# Altium PCB multiplexor checkpoint1.PcbDoc (part 2 of 2)
Units mil, origin at the board's own origin, x right, y up, seen from the top; angles counter-clockwise.
Board outline 12250 x 17250 mil, 4 copper layers (Top Layer, Middle 1, Middle 2, Bottom Layer), stack 59.2 mil thick; 172 components, 213 nets, 892 pads, 91 vias.
Unrouted connection lines stored in the file: 234.
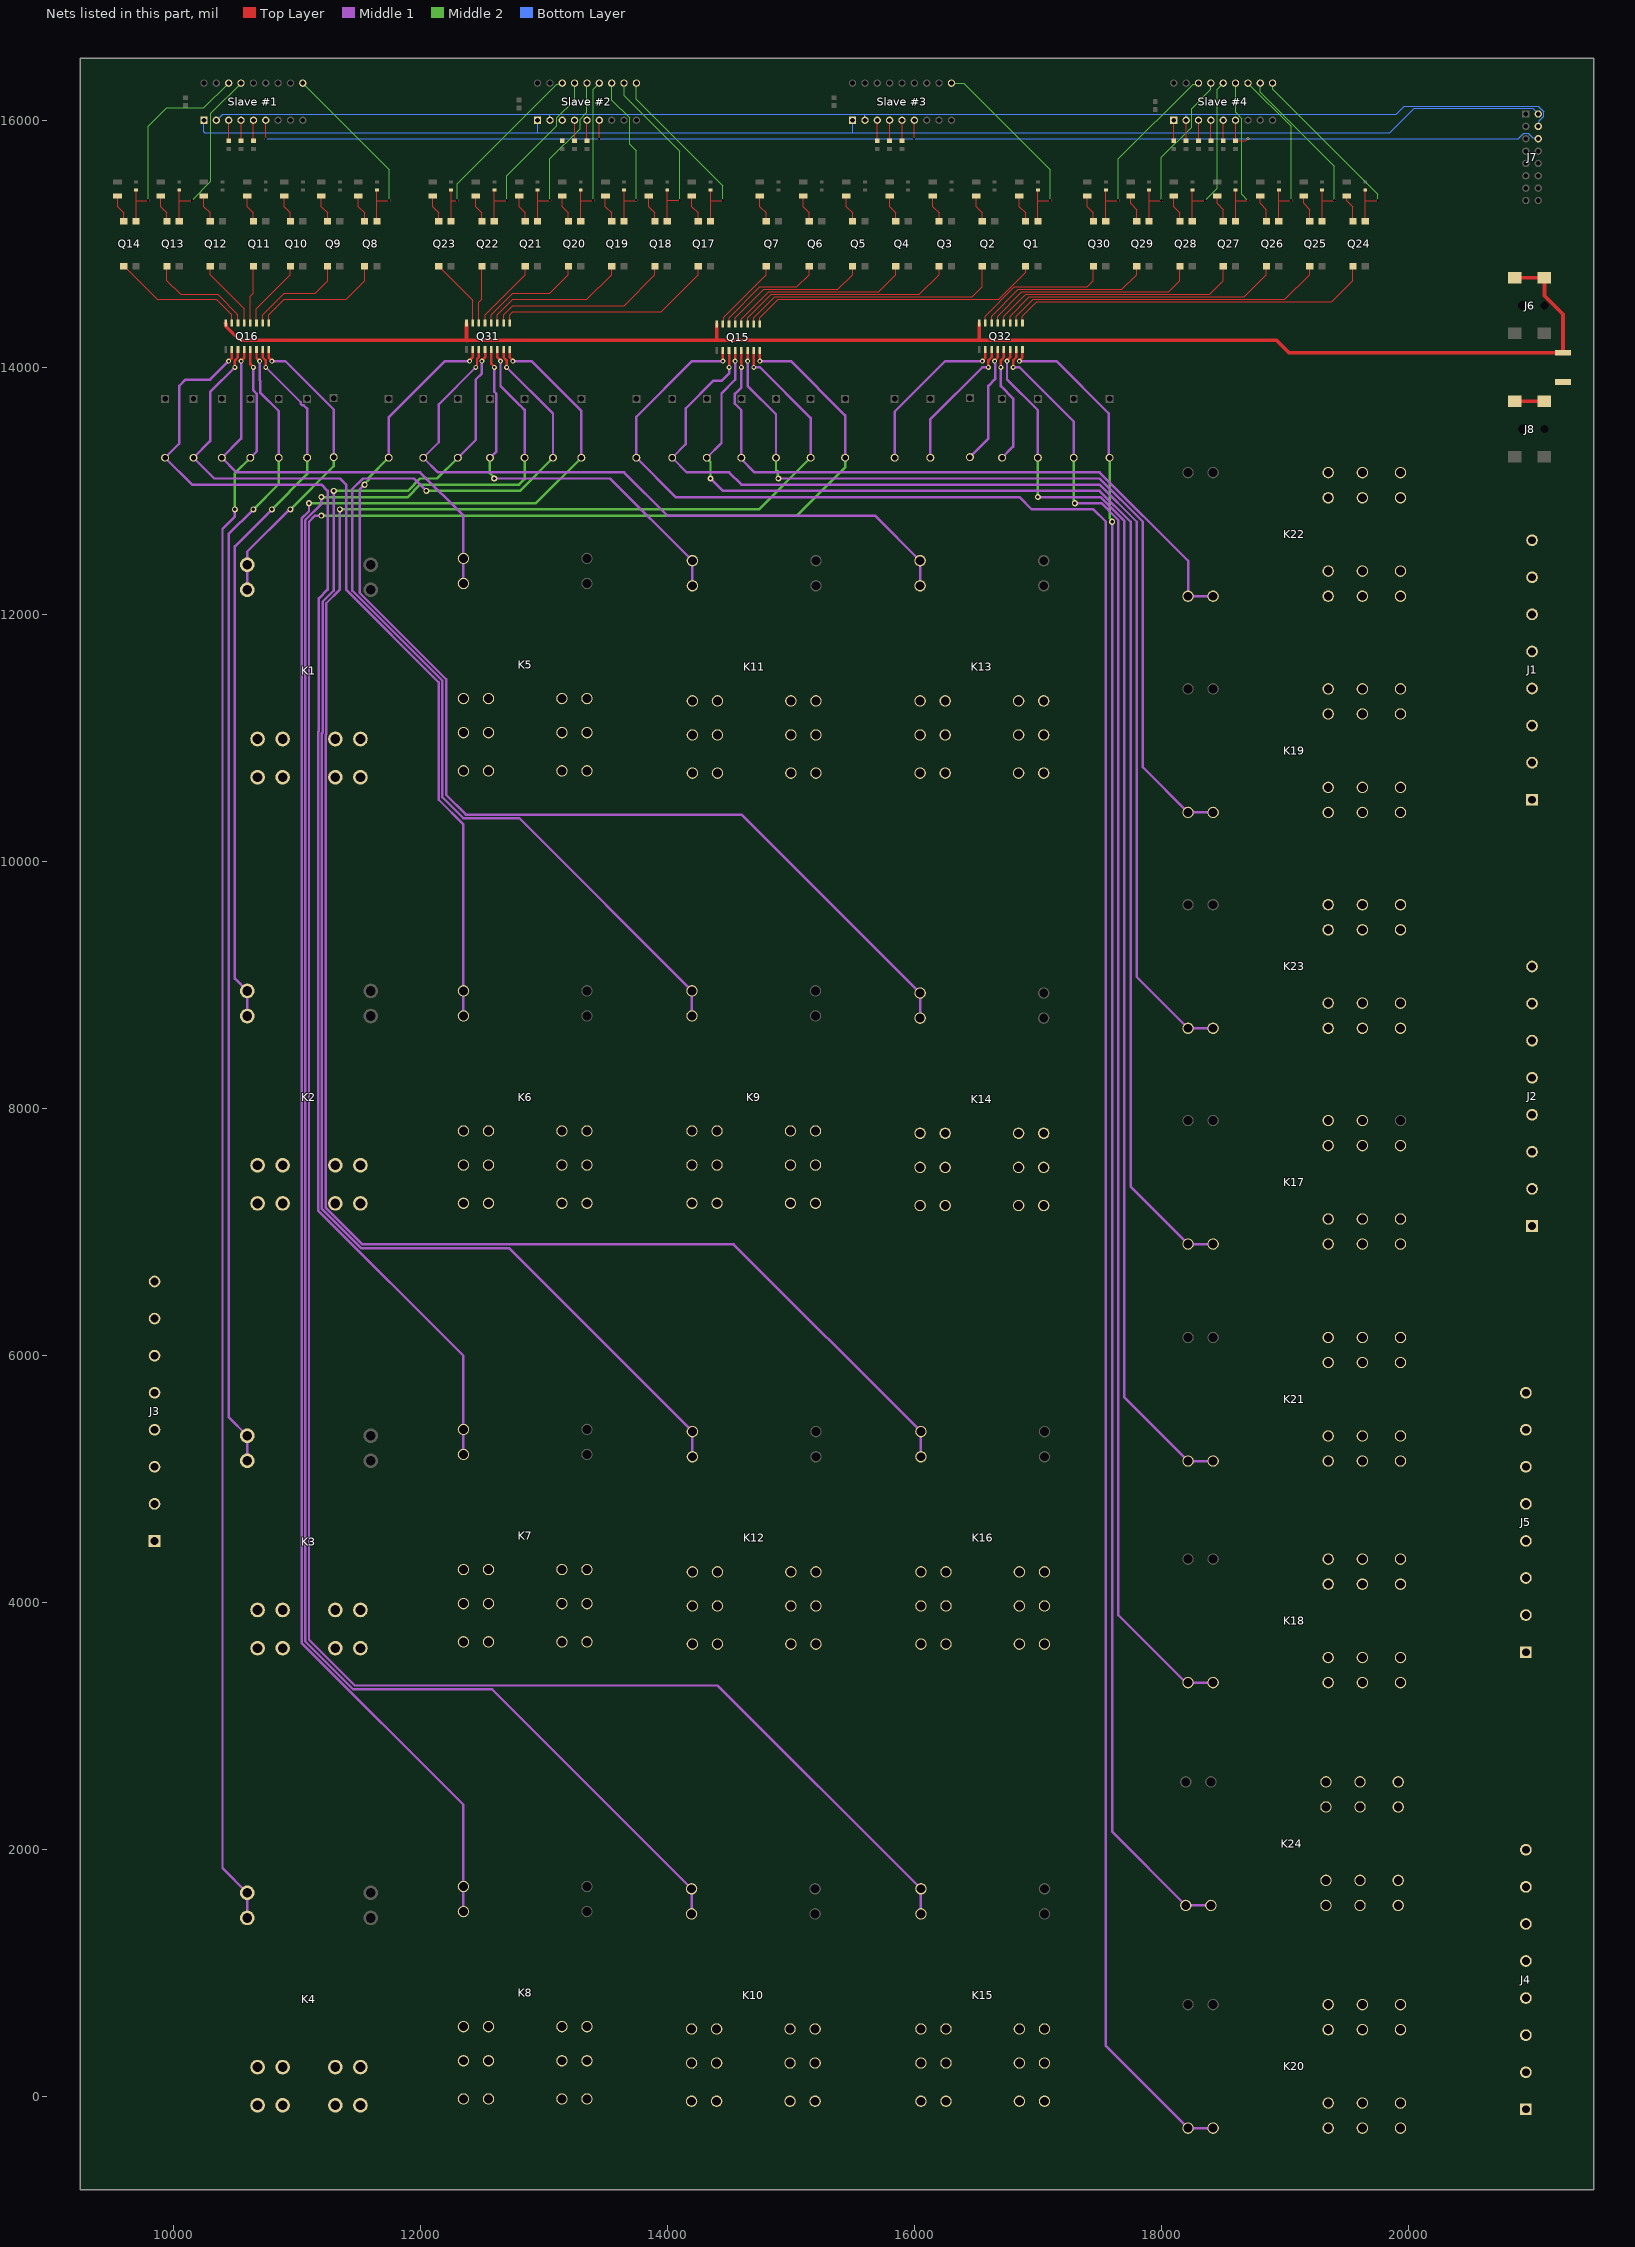
[diagram p4: the nets of this part, all layers, seen from the top]

## Via types
v1: diameter 22, hole 22, Top Layer to Bottom Layer, 41 vias
v2: diameter 40, hole 20, Top Layer to Bottom Layer, 28 vias
v3: diameter 50, hole 28, Top Layer to Bottom Layer, 19 vias
v4: diameter 22, hole 10, Top Layer to Bottom Layer, 3 vias

## Nets (pads, with @x,y where several pads share a name; then routed paths per layer and width w, separated by ;. In a path a pad name is that pad's centre, name@x,y a point inside that pad or via, vN(x,y) a via of type N, cw(c..) or ccw(c..) an arc to the next point about the centre after c; other vN are vias at no path point) (continued)
Net11_2: 11.2 "Slave #1.15" Q13.1 | length 1469.4
  Top Layer w10: Q13.1@10050,15181.1 10050,15350 ; 11.2@10050,15434.82 10050,15350 ; v1(10150,15350) 10050,15350
  Middle 2 w10: v1(10150,15350) 10305.5,15505.5 10305.5,16055.5 10550,16300
Net12_2: 12.2 "Slave #1.16" Q14.1 | length 1748.7
  Top Layer w10: Q14.1@9700,15181.1 9700,15350 ; 12.2@9700,15434.82 9700,15350 ; v1(9800,15350) 9700,15350
  Middle 2 w10: v1(9800,15350) 9800,15950 9950,16100 10250,16100 10450,16300
Net13_2: 13.2 "Slave #3.10" Q1.1 | length 1693.7
  Top Layer w10: Q1.1@17000,15181.1 17000,15350 ; 13.2@17000,15434.82 17000,15350 ; v1(17100,15350) 17000,15350
  Middle 2 w10: 16300,16300 16400,16300 17100,15600 v1(17100,15350)
Net14_2: 14.2 "Slave #1.10" Q8.1 | length 1593.7
  Top Layer w10: Q8.1@11650,15181.1 11650,15350 ; 14.2@11650,15434.82 11650,15350 ; v1(11750,15350) 11650,15350
  Middle 2 w10: 11050,16300 11750,15600 v1(11750,15350)
Net15_2: 15.2 Q2.2 | length 227.6
  Top Layer w10: 15.2@16500,15388 16500,15300 16550,15250 Q2.2@16550,15181.1
Net16_2: 16.2 Q3.2 | length 227.6
  Top Layer w10: 16.2@16150,15388 16150,15300 16200,15250 Q3.2@16200,15181.1
Net17_2: 17.2 Q4.2 | length 227.6
  Top Layer w10: 17.2@15800,15388 15800,15300 15850,15250 Q4.2@15850,15181.1
Net18_2: 18.2 Q5.2 | length 227.6
  Top Layer w10: 18.2@15450,15388 15450,15300 15500,15250 Q5.2@15500,15181.1
Net19_2: 19.2 Q6.2 | length 227.6
  Top Layer w10: 19.2@15100,15388 15100,15300 15150,15250 Q6.2@15150,15181.1
Net20_2: 20.2 Q7.2 | length 227.6
  Top Layer w10: 20.2@14750,15388 14750,15300 14800,15250 Q7.2@14800,15181.1
Net21_2: 21.2 Q9.2 | length 227.6
  Top Layer w10: 21.2@11200,15388 11200,15300 11250,15250 Q9.2@11250,15181.1
Net22_2: 22.2 Q10.2 | length 227.6
  Top Layer w10: 22.2@10900,15388 10900,15300 10950,15250 Q10.2@10950,15181.1
Net23_2: 23.2 Q11.2 | length 227.6
  Top Layer w10: 23.2@10600,15388 10600,15300 10650,15250 Q11.2@10650,15181.1
Net24_2: 24.2 Q12.2 | length 227.6
  Top Layer w10: 24.2@10250,15388 10250,15300 10300,15250 Q12.2@10300,15181.1
Net25_2: 25.2 Q13.2 | length 227.6
  Top Layer w10: 25.2@9900,15388 9900,15300 9950,15250 Q13.2@9950,15181.1
Net26_2: 26.2 Q14.2 | length 227.6
  Top Layer w10: 26.2@9550,15388 9550,15300 9600,15250 Q14.2@9600,15181.1
Net27_2: 27.2 Q1.2 | length 227.6
  Top Layer w10: 27.2@16850,15388 16850,15300 16900,15250 Q1.2@16900,15181.1
Net28_2: 28.2 Q8.2 | length 227.6
  Top Layer w10: 28.2@11500,15388 11500,15300 11550,15250 Q8.2@11550,15181.1
Net29_2: 29.2 "Slave #2.10" Q17.1 | length 1593.7
  Top Layer w10: Q17.1@14350,15181.1 14350,15350 ; 29.2@14350,15434.82 14350,15350 ; v1(14450,15350) 14350,15350
  Middle 2 w10: 13750,16300 13750,16169.99 14450,15469.99 v1(14450,15350)
Net30_2: 30.2 "Slave #2.11" Q18.1 | length 1491.1
  Top Layer w10: Q18.1@14000,15181.1 14000,15352.3 ; 30.2@14000,15434.82 14000,15352.3 ; v1(14100,15350) 14097.7,15352.3 14000,15352.3
  Middle 2 w10: 13650,16300 13650,16200 14100,15750 v1(14100,15350)
Net31_2: 31.2 "Slave #2.12" Q19.1 | length 1381.7
  Top Layer w10: Q19.1@13650,15181.1 13650,15350 ; 31.2@13650,15434.82 13650,15350 ; v1(13747.47,15352.2) 13745.26,15350 13650,15350
  Middle 2 w10: 13550,16300 13550,16162.93 13694.5,16018.43 13694.5,15805.5 13747.47,15752.53 v1(13747.47,15352.2)
Net32_2: 32.2 "Slave #2.13" Q20.1 | length 1324.4
  Top Layer w10: Q20.1@13300,15181.1 13300,15350 ; 32.2@13300,15434.82 13300,15350 ; v1(13400,15350) 13300,15350
  Middle 2 w10: v1(13400,15350) 13400,16250 13450,16300
Net33_2: 33.2 "Slave #2.14" Q21.1 | length 1428
  Top Layer w10: Q21.1@12950,15181.1 12950,15350 ; 33.2@12950,15434.82 12950,15350 ; v1(13050,15350) 12950,15350
  Middle 2 w10: v1(13050,15350) 13050,15686.77 13294.5,15931.27 13294.5,16007.43 13350,16062.93 13350,16300
Net34_2: 34.2 "Slave #2.15" Q22.1 | length 1531.5
  Top Layer w10: Q22.1@12600,15181.1 12600,15350 ; 34.2@12600,15434.82 12600,15350 ; v1(12700,15350) 12600,15350
  Middle 2 w10: v1(12700,15350) 12700,15550 13105.5,15955.5 13105.5,16018.43 13250,16162.93 13250,16300
Net35_2: 35.2 "Slave #2.16" Q23.1 | length 1627.3
  Top Layer w10: Q23.1@12250,15181.1 12250,15350 ; 35.2@12250,15434.82 12250,15350 ; v1(12300,15350) 12250,15350
  Middle 2 w10: v1(12300,15350) 12300,15486.77 13105.5,16292.27 13142.27,16292.27 13150,16300
Net36_2: 36.2 "Slave #4.12" Q26.1 | length 1448.7
  Top Layer w10: Q26.1@18950,15181.1 18950,15350 ; 36.2@18950,15434.82 18950,15350 ; v1(19050,15350) 18950,15350
  Middle 2 w10: 18700,16300 19050,15950 v1(19050,15350)
Net37_2: 37.2 "Slave #4.13" Q27.1 | length 1345.1
  Top Layer w10: Q27.1@18600,15181.1 18600,15350 ; 37.2@18600,15434.82 18600,15350 ; v1(18700,15350) 18600,15350
  Middle 2 w10: 18600,16300 18600,16062.93 18650,16012.93 18650,15400 v1(18700,15350)
Net38_2: 38.2 "Slave #4.14" Q28.1 | length 1365.8
  Top Layer w10: Q28.1@18250,15181.1 18250,15350 ; 38.2@18250,15434.82 18250,15350 ; v1(18350,15350) 18250,15350
  Middle 2 w10: v1(18350,15350) 18450,15450 18450,16250 18500,16300
Net39_2: 39.2 "Slave #4.15" Q29.1 | length 1469.4
  Top Layer w10: Q29.1@17900,15181.1 17900,15350 ; 39.2@17900,15434.82 17900,15350 ; v1(18000,15350) 17900,15350
  Middle 2 w10: v1(18000,15350) 18000,15700 18244.5,15944.5 18244.5,16094.5 18400,16250 18400,16300
Net40_2: 40.2 "Slave #4.16" Q30.1 | length 1594.5
  Top Layer w10: Q30.1@17550,15181.1 17550,15350 ; 40.2@17550,15434.82 17550,15350 ; v1(17650,15350) 17550,15350
  Middle 2 w10: v1(17650,15350) 17650,15686.77 18255.5,16292.27 18292.27,16292.27 18300,16300
Net41_2: 41.2 "Slave #4.10" Q24.1 | length 1655.8
  Top Layer w10: Q24.1@19650,15181.1 19650,15350 ; 41.2@19650,15434.82 19650,15350 ; v1(19750,15350) 19650,15350
  Middle 2 w10: 18900,16300 18900,16250 19750,15400 v1(19750,15350)
Net42_2: 42.2 "Slave #4.11" Q25.1 | length 1552.2
  Top Layer w10: Q25.1@19300,15181.1 19300,15350 ; 42.2@19300,15434.82 19300,15350 ; v1(19400,15350) 19300,15350
  Middle 2 w10: 18800,16300 18800,16228.28 19400,15628.28 v1(19400,15350)
Net43_2: 43.2 Q17.2 | length 227.6
  Top Layer w10: 43.2@14200,15388 14200,15300 14250,15250 Q17.2@14250,15181.1
Net44_2: 44.2 Q18.2 | length 227.6
  Top Layer w10: 44.2@13850,15388 13850,15300 13900,15250 Q18.2@13900,15181.1
Net45_2: 45.2 Q19.2 | length 227.6
  Top Layer w10: 45.2@13500,15388 13500,15300 13550,15250 Q19.2@13550,15181.1
Net46_2: 46.2 Q20.2 | length 227.6
  Top Layer w10: 46.2@13150,15388 13150,15300 13200,15250 Q20.2@13200,15181.1
Net47_2: 47.2 Q21.2 | length 227.6
  Top Layer w10: 47.2@12800,15388 12800,15300 12850,15250 Q21.2@12850,15181.1
Net48_2: 48.2 Q22.2 | length 227.6
  Top Layer w10: 48.2@12450,15388 12450,15300 12500,15250 Q22.2@12500,15181.1
Net49_2: 49.2 Q23.2 | length 227.6
  Top Layer w10: 49.2@12100,15388 12100,15300 12150,15250 Q23.2@12150,15181.1
Net50_2: 50.2 Q26.2 | length 227.6
  Top Layer w10: 50.2@18800,15388 18800,15327.1 18850,15277.1 Q26.2@18850,15181.1
Net51_2: 51.2 Q27.2 | length 227.6
  Top Layer w10: 51.2@18450,15388 18450,15327.1 18500,15277.1 Q27.2@18500,15181.1
Net52_2: 52.2 Q28.2 | length 227.6
  Top Layer w10: 52.2@18100,15388 18100,15300 18150,15250 Q28.2@18150,15181.1
Net53_2: 53.2 Q29.2 | length 227.6
  Top Layer w10: 53.2@17750,15388 17750,15327.1 17800,15277.1 Q29.2@17800,15181.1
Net54_2: 54.2 Q30.2 | length 227.6
  Top Layer w10: 54.2@17400,15388 17400,15300 17450,15250 Q30.2@17450,15181.1
Net55_2: 55.2 Q24.2 | length 227.6
  Top Layer w10: 55.2@19500,15388 19500,15350 19550,15300 Q24.2@19550,15181.1
Net56_2: 56.2 Q25.2 | length 227.6
  Top Layer w10: 56.2@19150,15388 19150,15327.1 19200,15277.1 Q25.2@19200,15181.1
NetCR1_2: CR1.2 K1.1_1 K1.1_2 Q16.16 | length 2519.2
  Top Layer w20: Q16.16@10775,14142.75 10775,14075.54 10800,14050.54 v2(10800,14050)
  Middle 1 w20: K1.1_1@10600,12198.82 K1.1_2@10600,12401.97 10600,12508.08 10941.92,12850 v3(10950,12850) ; v2(10800,14050) 10907.72,14050 11300,13657.72 CR1.2@11300,13273
  Middle 2 w20: v3(10950,12850) 11300,13200 CR1.2@11300,13273
NetCR2_2: CR2.2 K2.1_1 K2.1_2 Q16.15 | length 5834
  Top Layer w20: Q16.15@10725,14142.75 10725,14081.57 10750,14056.57 v2(10750,14000)
  Middle 1 w20: K2.1_1@10600,8748.82 K2.1_2@10600,8951.97 10500,9051.97 10500,12550 v3(10800,12850) ; v2(10750,14000) 11033,13717 11033,13704.72 11044.72,13693 11057,13693 11085,13665 CR2.2@11085,13268
  Middle 2 w20: v3(10800,12850) 11085,13135 CR2.2@11085,13268
NetCR3_2: CR3.2 K3.1_1 K3.1_2 Q16.14 | length 9298.4
  Top Layer w20: Q16.14@10675,14142.75 10675,14075.54 10700,14050.54 v2(10700,14050)
  Middle 1 w20: K3.1_1@10600,5148.82 K3.1_2@10600,5351.97 10450,5501.97 10450,12650 v3(10650,12850) ; v2(10700,14050) 10700,13895.82 10707,13888.82 10707,13793 10855,13645 CR3.2@10855,13268
  Middle 2 w20: v3(10650,12850) 10855,13055 CR3.2@10855,13268
NetCR4_2: CR4.2 K4.1_1 K4.1_2 Q16.13 | length 12913.1
  Top Layer w20: Q16.13@10625,14142.75 10625,14025.54 10650,14000.54 v2(10650,14000)
  Middle 1 w20: v3(10500,12850) 10500,12792.43 10400,12692.43 10400,1851.97 K4.1_2@10600,1651.97 K4.1_1@10600,1448.82 ; CR4.2@10625,13268 10677,13320 10677,13785.28 10650,13812.28 v2(10650,14000)
  Middle 2 w20: v3(10500,12850) 10500,13143 CR4.2@10625,13268
NetCR5_2: CR5.2 K5.1 K5.2 Q16.12 | length 3648.2
  Top Layer w20: v2(10550,14050) 10550,14050.54 10575,14075.54 Q16.12@10575,14142.75
  Middle 1 w20: v2(10550,14050) 10550,13423 CR5.2@10395,13268 10513,13150 12000,13150 12350,12800 K5.1@12350,12453 K5.2@12350,12250
NetCR6_2: CR6.2 K6.1 K6.2 Q16.11 | length 7042.7
  Top Layer w20: v2(10500,14000) 10500,14056.57 10525,14081.57 Q16.11@10525,14142.75
  Middle 1 w20: v2(10500,14000) 10300,13800 10300,13403 CR6.2@10165,13268 10333,13100 11350,13100 11400,13050 11400,12200 12150,11450 12150,10500 12350,10300 K6.1@12350,8953 K6.2@12350,8750
NetCR7_2: CR7.2 K7.1 K7.2 Q16.10 | length 10960.1
  Top Layer w20: v2(10450,14050) 10475,14075 Q16.10@10475,14142.75
  Middle 1 w20: v2(10450,14050) 10300,13900 10100,13900 10050,13850 10050,13383 CR7.2@9935,13268 10153,13050 11200,13050 11250,13000 11250,12200 11180,12130 11180,11054.86 11174.15,11049.01 11174.15,7174.61 12350,5998.77 K7.1@12350,5403 K7.2@12350,5200
NetCR8_2: CR8.2 K8.1 K8.2 Q31.16 | length 15527.8
  Top Layer w20: Q31.16@12725,14142.75 12725,14080.41 12750,14055.41 v2(12750,14050)
  Middle 1 w20: v3(11100,12900) 11100,12834.85 11040,12774.85 11040,3675.15 12350,2365.15 K8.1@12350,1703 K8.2@12350,1500 ; v2(12750,14050) 12900,14050 13305,13645 CR8.2@13305,13268
  Middle 2 w20: v3(11100,12900) 12937,12900 CR8.2@13305,13268
NetCR9_2: CR9.2 K9.1 K9.2 Q31.15 | length 8521.7
  Top Layer w20: Q31.15@12675,14142.75 12675,14081.57 12700,14056.57 v2(12700,14000)
  Middle 1 w20: v3(12050,13000) 11950,13100 11536.36,13100 11450,13013.64 11450,12192.43 12180,11462.43 12180,10520 12350,10350 12803,10350 K9.1@14200,8953 K9.2@14200,8750 ; v2(12700,14000) 13075,13625 CR9.2@13075,13268
  Middle 2 w20: v3(12050,13000) 12807,13000 CR9.2@13075,13268
NetCR10_2: CR10.2 K10.1 K10.2 Q31.14 | length 16321.3
  Top Layer w20: Q31.14@12625,14142.75 12625,14080.41 12650,14055.41 v2(12650,14050)
  Middle 1 w20: v3(11200,12950) 11200,12892.43 11070,12762.43 11070,3687.57 11457.57,3300 12581.5,3300 K10.1@14197,1684.5 K10.2@14197,1481.5 ; v2(12650,14050) 12650,13850 12793,13707 12793,13704.72 12804.72,13693 12807,13693 12845,13655 CR10.2@12845,13268
  Middle 2 w20: v3(11200,12950) 11900,12950 12000,13050 12800,13050 12845,13095 CR10.2@12845,13268
NetCR11_2: CR11.2 K11.1 K11.2 Q31.13 | length 3177.8
  Top Layer w20: Q31.13@12575,14142.75 12575,14030.41 12600,14005.41 v2(12600,14000)
  Middle 1 w20: CR11.2@12565,13268 12617,13320 12617,13785.28 12600,13802.28 v2(12600,14000) ; v3(12600,13100) 13537.5,13100 K11.1@14203,12434.5 K11.2@14203,12231.5
  Middle 2 w20: CR11.2@12565,13268 12565,13142.78 12600,13107.78 v3(12600,13100)
NetCR12_2: CR12.2 K12.1 K12.2 Q31.12 | length 11883
  Top Layer w20: v2(12500,14050) 12500,14055.41 12525,14080.41 Q31.12@12525,14142.75
  Middle 1 w20: v3(11300,13000) 11300,12192.43 11210,12102.43 11210,11042.43 11204.15,11036.58 11204.15,7187.04 11521.19,6870 12717.5,6870 K12.1@14203,5384.5 K12.2@14203,5181.5 ; CR12.2@12305,13268 12450,13413 12450,13900 12500,13950 v2(12500,14050)
  Middle 2 w20: v3(11300,13000) 11900,13000 12000,13100 12137,13100 CR12.2@12305,13268
NetCR13_2: CR13.2 K13.1 K13.2 Q31.11 | length 5631.4
  Top Layer w20: v2(12450,14000) 12450,14000.54 12460,14010.54 12460,14066.57 12475,14081.57 Q31.11@12475,14142.75
  Middle 1 w20: v2(12450,14000) 12150,13700 12150,13393 CR13.2@12025,13268 12143,13150 13650,13150 14000,12800 15681.5,12800 K13.1@16047,12434.5 K13.2@16047,12231.5
NetCR14_2: CR14.2 K14.1 K14.2 Q31.10 | length 9093.9
  Top Layer w20: v2(12400,14050) 12400,14055.41 12425,14080.41 Q31.10@12425,14142.75
  Middle 1 w20: v3(11550,13050) 11510,13010 11510,12174.85 12210,11474.85 12210,10540 12370,10380 14601.5,10380 K14.1@16047,8934.5 K14.2@16047,8731.5 ; CR14.2@11745,13268 11745,13595 12200,14050 v2(12400,14050)
  Middle 2 w20: v3(11550,13050) 11550,13058.12 11584.46,13092.58 11584.46,13107.46 CR14.2@11745,13268
NetCR15_2: CR15.2 K15.1 K15.2 Q15.16 | length 20940.9
  Top Layer w20: v2(14750,14050) Q15.16@14750,14135.5
  Middle 1 w20: v3(11200,12800) 11150,12800 11100,12750 11100,3700 11470,3330 14407.5,3330 K15.1@16053,1684.5 K15.2@16053,1481.5 ; v2(14750,14050) 15000,14050 15440,13610 CR15.2@15440,13268
  Middle 2 w20: v3(11200,12800) 15050,12800 15440,13190 CR15.2@15440,13268
NetCR16_2: CR16.2 K16.1 K16.2 Q15.15 | length 16542.6
  Top Layer w20: v2(14700,14000) Q15.15@14700,14135.5
  Middle 1 w20: v3(11350,12850) 11350,12200 11240,12090 11240,11030 11234.15,11024.16 11234.15,7199.46 11533.62,6900 14537.5,6900 K16.1@16053,5384.5 K16.2@16053,5181.5 ; v2(14700,14000) 14750,14000 15160,13590 CR16.2@15160,13268
  Middle 2 w20: v3(11350,12850) 14742,12850 CR16.2@15160,13268
NetCR17_2: CR17.2 K19.1 K19.2 Q15.14 | length 6941.4
  Top Layer w20: v2(14650,14050) Q15.14@14650,14135.5
  Middle 1 w20: v2(14650,14050) 14650,13850 14880,13620 CR17.2@14880,13268 ; v3(14900,13100) 17500,13100 17850,12750 17850,10762.5 K19.1@18215.5,10397 K19.2@18418.5,10397
  Middle 2 w20: CR17.2@14880,13268 14880,13170 14895,13155 14895,13105 v3(14900,13100)
NetCR18_2: CR18.2 K22.1 K22.2 Q15.13 | length 5368.8
  Top Layer w20: v2(14600,14000) Q15.13@14600,14135.5
  Middle 1 w20: v2(14600,14000) 14600,13837.28 14548,13785.28 14548,13704.72 14600,13652.72 14600,13256.09 14706.09,13150 17500,13150 18215.5,12434.5 K22.1@18215.5,12147 K22.2@18418.5,12147
NetCR19_2: CR19.2 K17.1 K17.2 Q15.12 | length 10931
  Top Layer w20: v2(14550,14050) Q15.12@14550,14135.5
  Middle 1 w20: CR19.2@14320,13268 14439.02,13387.02 14439.02,13789.02 14550,13900 v2(14550,14050) ; v3(14350,13100) 14450,13000 17500,13000 17750,12750 17750,7368.5 K17.1@18215.5,6903 K17.2@18418.5,6903
  Middle 2 w20: CR19.2@14320,13268 14320,13264.28 14350,13234.28 v3(14350,13100)
NetCR20_2: CR20.2 K23.1 K23.2 Q15.11 | length 9547.1
  Top Layer w20: v2(14500,14000) Q15.11@14500,14135.5
  Middle 1 w20: v2(14500,14000) 14500,13950 14442.45,13892.45 14375.17,13892.45 14150,13667.28 14150,13378 CR20.2@14040,13268 14158,13150 14500,13150 14600,13050 17500,13050 17800,12750 17800,9065.5 K23.1@18215.5,8650 K23.2@18418.5,8650
NetCR21_2: CR21.2 K20.1 K20.2 Q15.10 | length 18800.1
  Top Layer w20: v2(14450,14050) Q15.10@14450,14135.5
  Middle 1 w20: v2(14450,14050) 14200,14050 13750,13600 CR21.2@13750,13268 14068,12950 16850,12950 16950,12850 17450,12850 17550,12750 17550,412.5 K20.1@18215.5,-253 K20.2@18418.5,-253
NetCR22_2: CR22.2 K24.1 K24.2 Q32.16 | length 13539.8
  Top Layer w20: v2(16850,14050) 16850,14055.41 16875,14080.41 Q32.16@16875,14142.75
  Middle 1 w20: v2(16850,14050) 17150,14050 17572.25,13627.75 17572.25,13275.75 CR22.2@17580,13268 ; v3(17600,12750) 17600,2147 K24.1@18197,1550 K24.2@18400,1550
  Middle 2 w20: CR22.2@17580,13268 17580,12778.12 17600,12758.12 v3(17600,12750)
NetCR23_2: CR23.2 K18.1 K18.2 Q32.15 | length 11754.7
  Top Layer w20: v2(16800,14000) 16800,14056.57 16825,14081.57 Q32.15@16825,14142.75
  Middle 1 w20: v2(16800,14000) 16850,14000 17290,13560 CR23.2@17290,13268 ; v3(17300,12900) 17513.64,12900 17650,12763.64 17650,3900 18197,3353 K18.1@18215.5,3353 K18.2@18418.5,3353
  Middle 2 w20: CR23.2@17290,13268 17290,12918.12 17300,12908.12 v3(17300,12900)
NetCR24_2: CR24.2 K21.1 K21.2 Q32.14 | length 10112.6
  Top Layer w20: v2(16750,14050) 16750,14055.41 16775,14080.41 Q32.14@16775,14142.75
  Middle 1 w20: v2(16750,14050) 16750,13902.72 17000,13652.72 CR24.2@17000,13268 ; v3(17000,12950) 17506.07,12950 17700,12756.07 17700,5662.5 K21.1@18215.5,5147 K21.2@18418.5,5147
  Middle 2 w20: v3(17000,12950) CR24.2@17000,13268
NetCR25_2: CR25.2 Q32.13 | length 963.8
  Top Layer w20: v2(16700,14000) 16700,14056.57 16725,14081.57 Q32.13@16725,14142.75
  Middle 1 w20: v2(16700,14000) 16700,13847.28 16800,13747.28 16800,13358 CR25.2@16710,13268
NetCR26_2: CR26.2 Q32.12 | length 966.1
  Top Layer w20: v2(16650,14050) 16650,14055.41 16675,14080.41 Q32.12@16675,14142.75
  Middle 1 w20: CR26.2@16450,13273 16600,13423 16600,13850 16653.83,13903.83 16653.83,14046.17 v2(16650,14050)
NetCR27_2: CR27.2 Q32.11 | length 1109.1
  Top Layer w20: v2(16600,14000) 16600,14056.57 16625,14081.57 Q32.11@16625,14142.75
  Middle 1 w20: CR27.2@16130,13268 16130,13580 16550,14000 v2(16600,14000)
NetCR28_2: CR28.2 Q32.10 | length 1354.9
  Top Layer w20: v2(16550,14050) 16550,14052.21 16575,14077.21 Q32.10@16575,14142.75
  Middle 1 w20: CR28.2@15840,13268 15840,13640 16250,14050 v2(16550,14050)
NetJ1_1: J1.1 K19.11 K19.12
NetJ1_2: J1.2 K19.5 K19.6
NetJ1_3: J1.3 K19.13 K19.14
NetJ1_4: J1.4 K19.3 K19.4
NetJ1_5: J1.5 K22.11 K22.12
NetJ1_6: J1.6 K22.5 K22.6
NetJ1_7: J1.7 K22.13 K22.14
NetJ1_8: J1.8 K22.3 K22.4
NetJ2_1: J2.1 K17.11 K17.12
NetJ2_2: J2.2 K17.5 K17.6
NetJ2_3: J2.3 K17.13 K17.14
NetJ2_4: J2.4 K17.3 K17.4
NetJ2_5: J2.5 K23.11 K23.12
NetJ2_6: J2.6 K23.5 K23.6
NetJ2_7: J2.7 K23.13 K23.14
NetJ2_8: J2.8 K23.3 K23.4
NetJ3_1: J3.1 K4.6_1 K4.6_2
NetJ3_2: J3.2 K4.2_1 K4.2_2
NetJ3_3: J3.3 K3.6_1 K3.6_2
NetJ3_4: J3.4 K3.2_1 K3.2_2
NetJ3_5: J3.5 K2.6_1 K2.6_2
NetJ3_6: J3.6 K2.2_1 K2.2_2
NetJ3_7: J3.7 K1.6_1 K1.6_2
NetJ3_8: J3.8 K1.2_1 K1.2_2
NetJ4_1: J4.1 K20.11 K20.12
NetJ4_2: J4.2 K20.5 K20.6
NetJ4_3: J4.3 K20.13 K20.14
NetJ4_4: J4.4 K20.3 K20.4
NetJ4_5: J4.5 K24.11 K24.12
NetJ4_6: J4.6 K24.5 K24.6
NetJ4_7: J4.7 K24.13 K24.14
NetJ4_8: J4.8 K24.3 K24.4
NetJ5_1: J5.1 K18.11 K18.12
NetJ5_2: J5.2 K18.5 K18.6
NetJ5_3: J5.3 K18.13 K18.14
NetJ5_4: J5.4 K18.3 K18.4
NetJ5_5: J5.5 K21.13 K21.14
NetJ5_6: J5.6 K21.3 K21.4
NetJ5_7: J5.7 K21.11 K21.12
NetJ5_8: J5.8 K21.5 K21.6
NetJ8_2: J8.2 J8.3 R16.2 | length 240.2
  Top Layer w30: J8.3@20859.84,13724.41 J8.2@21100,13724.41
NetK1_4_1: K1.4_1 K1.4_2 K5.9 K5.10
NetK1_8_1: K1.8_1 K1.8_2 K5.7 K5.8
NetK2_4_1: K2.4_1 K2.4_2 K6.9 K6.10
NetK2_8_1: K2.8_1 K2.8_2 K6.7 K6.8
NetK3_4_1: K3.4_1 K3.4_2 K7.9 K7.10
NetK3_8_1: K3.8_1 K3.8_2 K7.7 K7.8
NetK4_4_1: K4.4_1 K4.4_2 K8.9 K8.10
NetK4_8_1: K4.8_1 K4.8_2 K8.7 K8.8
NetK5_3: K5.3 K5.4 K6.3 K6.4 K10.7 K10.8
NetK5_5: K5.5 K5.6 K6.5 K6.6 K9.7 K9.8
NetK5_11: K5.11 K5.12 K6.11 K6.12 K9.9 K9.10
NetK5_13: K5.13 K5.14 K6.13 K6.14 K10.9 K10.10
NetK7_3: K7.3 K7.4 K8.3 K8.4 K12.7 K12.8
NetK7_5: K7.5 K7.6 K8.5 K8.6 K11.7 K11.8
NetK7_11: K7.11 K7.12 K8.11 K8.12 K11.9 K11.10
NetK7_13: K7.13 K7.14 K8.13 K8.14 K12.9 K12.10
NetK9_3: K9.3 K9.4 K11.3 K11.4 K14.7 K14.8
NetK9_5: K9.5 K9.6 K11.5 K11.6 K13.7 K13.8
NetK9_11: K9.11 K9.12 K11.11 K11.12 K13.9 K13.10
NetK9_13: K9.13 K9.14 K11.13 K11.14 K14.9 K14.10
NetK10_3: K10.3 K10.4 K12.3 K12.4 K16.7 K16.8
NetK10_5: K10.5 K10.6 K12.5 K12.6 K15.7 K15.8
NetK10_11: K10.11 K10.12 K12.11 K12.12 K15.9 K15.10
NetK10_13: K10.13 K10.14 K12.13 K12.14 K16.9 K16.10
NetK13_3: K13.3 K13.4 K22.7 K22.8
NetK13_5: K13.5 K13.6 K19.7 K19.8
NetK13_11: K13.11 K13.12 K19.9 K19.10
NetK13_13: K13.13 K13.14 K22.9 K22.10
NetK14_3: K14.3 K14.4 K23.7 K23.8
NetK14_5: K14.5 K14.6 K17.7 K17.8
NetK14_11: K14.11 K14.12 K17.10
NetK14_13: K14.13 K14.14 K23.9 K23.10
NetK15_3: K15.3 K15.4 K24.7 K24.8
NetK15_5: K15.5 K15.6 K20.7 K20.8
NetK15_11: K15.11 K15.12 K20.9 K20.10
NetK15_13: K15.13 K15.14 K24.9 K24.10
NetK16_3: K16.3 K16.4 K21.7 K21.8
NetK16_5: K16.5 K16.6 K18.7 K18.8
NetK16_11: K16.11 K16.12 K18.9 K18.10
NetK16_13: K16.13 K16.14 K21.9 K21.10
NetQ1_3: Q1.3 Q15.1 | length 2403.5
  Top Layer w10: Q15.1@14750,14350 14750,14400 14900,14550 16682.25,14550 16900,14767.75 Q1.3@16900,14818.9
NetQ2_3: Q2.3 Q15.2 | length 2172.5
  Top Layer w10: Q15.2@14700,14350 14700,14400 14870,14570 16470,14570 16550,14650 Q2.3@16550,14818.9
NetQ3_3: Q3.3 Q15.3 | length 1813.9
  Top Layer w10: Q15.3@14650,14350 14650,14400 14840,14590 16040,14590 16200,14750 Q3.3@16200,14818.9
NetQ4_3: Q4.3 Q15.4 | length 1508
  Top Layer w10: Q15.4@14600,14350 14600,14389.97 14820.03,14610 15710,14610 15850,14750 Q4.3@15850,14818.9
NetQ5_3: Q5.3 Q15.5 | length 1213.9
  Top Layer w10: Q15.5@14550,14350 14550,14400 14780,14630 15380,14630 15500,14750 Q5.3@15500,14818.9
NetQ6_3: Q6.3 Q15.6 | length 913.9
  Top Layer w10: Q15.6@14500,14350 14500,14400 14750,14650 15050,14650 15150,14750 Q6.3@15150,14818.9
NetQ7_3: Q7.3 Q15.7 | length 613.9
  Top Layer w10: Q15.7@14450,14350 14455.5,14355.5 14455.5,14405.5 14800,14750 Q7.3@14800,14818.9
NetQ8_3: Q8.3 Q16.1 | length 1075.6
  Top Layer w10: Q16.1@10775,14357.25 10775,14425 10900,14550 11400,14550 11550,14700 Q8.3@11550,14818.9
NetQ9_3: Q9.3 Q16.2 | length 825.6
  Top Layer w10: Q16.2@10725,14357.25 10725,14425 10900,14600 11150,14600 11250,14700 Q9.3@11250,14818.9
NetQ10_3: Q10.3 Q16.3 | length 575.6
  Top Layer w10: Q16.3@10675,14357.25 10675,14475 10950,14750 Q10.3@10950,14818.9
NetQ11_3: Q11.3 Q16.4 | length 472
  Top Layer w10: Q16.4@10625,14357.25 10625,14575 10650,14600 Q11.3@10650,14818.9
NetQ12_3: Q12.3 Q16.5 | length 575.6
  Top Layer w10: Q12.3@10300,14818.9 10300,14750 10575,14475 Q16.5@10575,14357.25
NetQ13_3: Q13.3 Q16.6 | length 875.6
  Top Layer w10: Q13.3@9950,14818.9 9950,14700 10060.35,14589.65 10360.35,14589.65 10525,14425 Q16.6@10525,14357.25
NetQ14_3: Q14.3 Q16.7 | length 1105.9
  Top Layer w10: Q14.3@9600,14818.9 9603.94,14818.9 9872.83,14550 10350,14550 10475,14425 Q16.7@10475,14357.25
NetQ17_3: Q17.3 Q31.1 | length 1796.3
  Top Layer w10: Q31.1@12725,14357.25 12725,14425 12750,14450 13950,14450 14250,14750 Q17.3@14250,14818.9
NetQ18_3: Q18.3 Q31.2 | length 1496.3
  Top Layer w10: Q31.2@12675,14357.25 12675,14425 12750,14500 13650,14500 13900,14750 Q18.3@13900,14818.9
NetQ19_3: Q19.3 Q31.3 | length 1196.3
  Top Layer w10: Q31.3@12625,14357.25 12625,14425 12750,14550 13350,14550 13550,14750 Q19.3@13550,14818.9
NetQ20_3: Q20.3 Q31.4 | length 896.3
  Top Layer w10: Q31.4@12575,14357.25 12575,14425 12749.95,14599.95 13049.95,14599.95 13200,14750 Q20.3@13200,14818.9
NetQ21_3: Q21.3 Q31.5 | length 596.3
  Top Layer w10: Q31.5@12525,14357.25 12525,14425 12850,14750 Q21.3@12850,14818.9
NetQ22_3: Q22.3 Q31.6 | length 472
  Top Layer w10: Q31.6@12475,14357.25 12475,14525 12500,14550 Q22.3@12500,14818.9
NetQ23_3: Q23.3 Q31.7 | length 577.9
  Top Layer w10: Q23.3@12150,14818.9 12153.94,14818.9 12174.53,14798.31 12174.53,14794.37 12425,14543.9 Q31.7@12425,14357.25
NetQ24_3: Q24.3 Q32.1 | length 2969.1
  Top Layer w10: Q32.1@16875,14357.25 16875,14413.97 16991.03,14530 19380,14530 19550,14700 Q24.3@19550,14818.9
NetQ25_3: Q25.3 Q32.2 | length 2640.1
  Top Layer w10: Q32.2@16825,14357.25 16825,14414.47 16960.53,14550 19000,14550 19200,14750 Q25.3@19200,14818.9
NetQ26_3: Q26.3 Q32.3 | length 2340.1
  Top Layer w10: Q32.3@16775,14357.25 16775,14414.47 16930.53,14570 18670,14570 18850,14750 Q26.3@18850,14818.9
NetQ27_3: Q27.3 Q32.4 | length 2069.4
  Top Layer w10: Q32.4@16725,14357.25 16725,14414.47 16900.53,14590 18390,14590 18500,14700 Q27.3@18500,14818.9
NetQ28_3: Q28.3 Q32.5 | length 1769.4
  Top Layer w10: Q32.5@16675,14357.25 16675,14414.47 16870.53,14610 18060,14610 18150,14700 Q28.3@18150,14818.9
NetQ29_3: Q29.3 Q32.6 | length 1440.1
  Top Layer w10: Q32.6@16625,14357.25 16625,14414.47 16840.53,14630 17680,14630 17800,14750 Q29.3@17800,14818.9
NetQ30_3: Q30.3 Q32.7 | length 1169.4
  Top Layer w10: Q32.7@16575,14357.25 16575,14414.47 16810.53,14650 17400,14650 17450,14700 Q30.3@17450,14818.9
NetR1_2: "Slave #1.3" R1.2 | length 166.5
  Top Layer w10: R1.2@10450,15833.46 10450,16000
NetR2_2: "Slave #1.4" R2.2 | length 166.5
  Top Layer w10: R2.2@10550,15833.46 10550,16000
NetR3_2: "Slave #1.5" R3.2 | length 166.5
  Top Layer w10: R3.2@10650,15833.46 10650,16000
NetR4_2: "Slave #2.3" R4.2
NetR5_2: "Slave #2.4" R5.2 | length 166.5
  Top Layer w10: R5.2@13250,15833.46 13250,16000
NetR6_2: "Slave #2.5" R6.2 | length 166.5
  Top Layer w10: R6.2@13350,15833.46 13350,16000
NetR9_2: "Slave #3.3" R9.2 | length 166.5
  Top Layer w10: R9.2@15700,15833.46 15700,16000
NetR10_2: "Slave #3.4" R10.2 | length 166.5
  Top Layer w10: R10.2@15800,15833.46 15800,16000
NetR11_2: "Slave #3.5" R11.2 | length 166.5
  Top Layer w10: R11.2@15900,15833.46 15900,16000
NetR13_2: "Slave #4.3" R13.2 | length 166.5
  Top Layer w10: R13.2@18300,15833.46 18300,16000
NetR14_2: "Slave #4.4" R14.2 | length 166.5
  Top Layer w10: R14.2@18400,15833.46 18400,16000
NetR15_2: "Slave #4.5" R15.2 | length 150
  Top Layer w10: R15.2@18500,15850 18500,16000
"pwr gnd": J6.2 J6.3 Q15.8 Q16.8 Q31.8 Q32.8 R16.1 | length 12256.6
  Top Layer w30: Q16.8@10425,14357.25 10429.5,14352.75 10429.5,14328.14 10539.57,14218.07 12376.41,14218.07 ; Q31.8@12375,14357.25 12375,14219.48 12376.41,14218.07 ; 12377.1,14217.38 12376.41,14218.07 ; 14399.36,14219.97 14400,14220.6 Q15.8@14400,14350 ; Q32.8@16525,14357.25 16525,14219.91 16525.73,14219.18 ; J6.3@20859.84,14724.41 J6.2@21100,14724.41 21100,14579.9 21250,14429.9 R16.1@21250,14118 19032,14118 18931.93,14218.07 16525,14218.07 14400,14218.07 12376.41,14218.07
RST: "Slave #1.6" "Slave #2.6" "Slave #3.6" "Slave #4.6" J7.6 R12.2 | length 11061.7
  Top Layer w10: v1(10750,15850) 10750,16000 ; v1(13450,15850) 13450,16000 ; v1(16000,15850) 16000,16000 ; 18600,16000 R12.2@18600,15833.46 18601.2,15832.27 18680.96,15832.27 18698.7,15850 v4(18700,15850)
  Bottom Layer w10: v1(10750,15850) v1(13450,15850) 20886.36,15850 20931.36,15895 20968.64,15895 21005,15858.64 21041.36,15858.64 J7.6@21050,15850
SCL: "Slave #1.1" "Slave #2.1" "Slave #3.1" "Slave #4.1" J7.2 R7.1 | length 11462.5
  Top Layer w10: R7.1@18100,15833.46 18100,16000
  Bottom Layer w10: 10250,16000 10250,15905.86 10255.86,15900 12950,15900 ; 12950,16000 12950,15900 ; 15500,16000 15500,15900 ; 18100,16000 18100,15900 ; J7.2@21050,16050 21005,16095 20045,16095 19850,15900 18100,15900 ; 12950,15900 15500,15900 ; 15500,15900 18100,15900
SDA: "Slave #1.2" "Slave #2.2" "Slave #3.2" "Slave #4.2" J7.4 R8.2 | length 11265.7
  Top Layer w10: R8.2@18200,15833.46 18200,16000
  Bottom Layer w10: 10350,16000 10400,16050 13050,16050 ; 13050,16000 13050,16050 ; 15600,16000 15600,16050 ; 18200,16000 18200,16050 ; J7.4@21050,15950 21058.64,15958.64 21058.64,15995 21095,16031.36 21095,16068.64 21048.64,16115 19965,16115 19900,16050 18200,16050 ; 13050,16050 15600,16050 ; 15600,16050 18200,16050
pads on no net: "Slave #1.7" "Slave #1.8" "Slave #1.17" "Slave #2.7" "Slave #2.8" "Slave #2.17" "Slave #3.7" "Slave #3.8" "Slave #3.17" "Slave #4.7" "Slave #4.8" "Slave #4.17" J6.4 J6.5 J7.5 J7.7 J7.8 J7.9 J7.10 J7.11 J7.12 J7.13 J7.14 J7.15 J7.16 J8.4 J8.5 K17.9 Q15.9 Q16.9 Q31.9 Q32.9
copper on no net: | length 59000
  Top Layer w10: 9250,-750 21500,-750 21500,16500 9250,16500 9250,-750

## Text inside footprints (layer, text, board x,y; h text height)
K5: Top Overlay "*" at 12337.5,12760 h50; Mechanical 13 "*" at 12337.5,12403 h50
K6: Top Overlay "*" at 12337.5,9260 h50; Mechanical 13 "*" at 12337.5,8903 h50
K7: Top Overlay "*" at 12337.5,5710 h50; Mechanical 13 "*" at 12337.5,5353 h50
K8: Top Overlay "*" at 12337.5,2010 h50; Mechanical 13 "*" at 12337.5,1653 h50
K9: Top Overlay "*" at 14187.5,9260 h50; Mechanical 13 "*" at 14187.5,8903 h50
K10: Top Overlay "*" at 14184.5,1991.5 h50; Mechanical 13 "*" at 14184.5,1634.5 h50
K11: Top Overlay "*" at 14190.5,12741.5 h50; Mechanical 13 "*" at 14190.5,12384.5 h50
K12: Top Overlay "*" at 14190.5,5691.5 h50; Mechanical 13 "*" at 14190.5,5334.5 h50
K13: Top Overlay "*" at 16034.5,12741.5 h50; Mechanical 13 "*" at 16034.5,12384.5 h50
K14: Top Overlay "*" at 16034.5,9241.5 h50; Mechanical 13 "*" at 16034.5,8884.5 h50
K15: Top Overlay "*" at 16040.5,1991.5 h50; Mechanical 13 "*" at 16040.5,1634.5 h50
K16: Top Overlay "*" at 16040.5,5691.5 h50; Mechanical 13 "*" at 16040.5,5334.5 h50
K17: Top Overlay "*" at 17908.5,6890.5 h50 r90; Mechanical 13 "*" at 18265.5,6890.5 h50 r90
K18: Top Overlay "*" at 17908.5,3340.5 h50 r90; Mechanical 13 "*" at 18265.5,3340.5 h50 r90
K19: Top Overlay "*" at 17908.5,10384.5 h50 r90; Mechanical 13 "*" at 18265.5,10384.5 h50 r90
K20: Top Overlay "*" at 17908.5,-265.5 h50 r90; Mechanical 13 "*" at 18265.5,-265.5 h50 r90
K21: Top Overlay "*" at 17908.5,5134.5 h50 r90; Mechanical 13 "*" at 18265.5,5134.5 h50 r90
K22: Top Overlay "*" at 17908.5,12134.5 h50 r90; Mechanical 13 "*" at 18265.5,12134.5 h50 r90
K23: Top Overlay "*" at 17908.5,8637.5 h50 r90; Mechanical 13 "*" at 18265.5,8637.5 h50 r90
K24: Top Overlay "*" at 17890,1537.5 h50 r90; Mechanical 13 "*" at 18247,1537.5 h50 r90
Q15: Top Overlay "*" at 14766,14372.5 h50 r270; Mechanical 13 "*" at 14718.5,14318.75 h50 r270
Q16: Top Overlay "*" at 10791,14379.75 h50 r270; Mechanical 13 "*" at 10743.5,14326 h50 r270
Q31: Top Overlay "*" at 12741,14379.75 h50 r270; Mechanical 13 "*" at 12693.5,14326 h50 r270
Q32: Top Overlay "*" at 16891,14379.75 h50 r270; Mechanical 13 "*" at 16843.5,14326 h50 r270
"Slave #1": Top Overlay "*" at 10215.5,15987.5 h50 r90; Mechanical 13 "*" at 10275,16007.5 h50 r90
"Slave #2": Top Overlay "*" at 12915.5,15987.5 h50 r90; Mechanical 13 "*" at 12975,16007.5 h50 r90
"Slave #3": Top Overlay "*" at 15465.5,15987.5 h50 r90; Mechanical 13 "*" at 15525,16007.5 h50 r90
"Slave #4": Top Overlay "*" at 18065.5,15987.5 h50 r90; Mechanical 13 "*" at 18125,16007.5 h50 r90